# EAGLE board LED_driver (EAGLE 9.1.3)
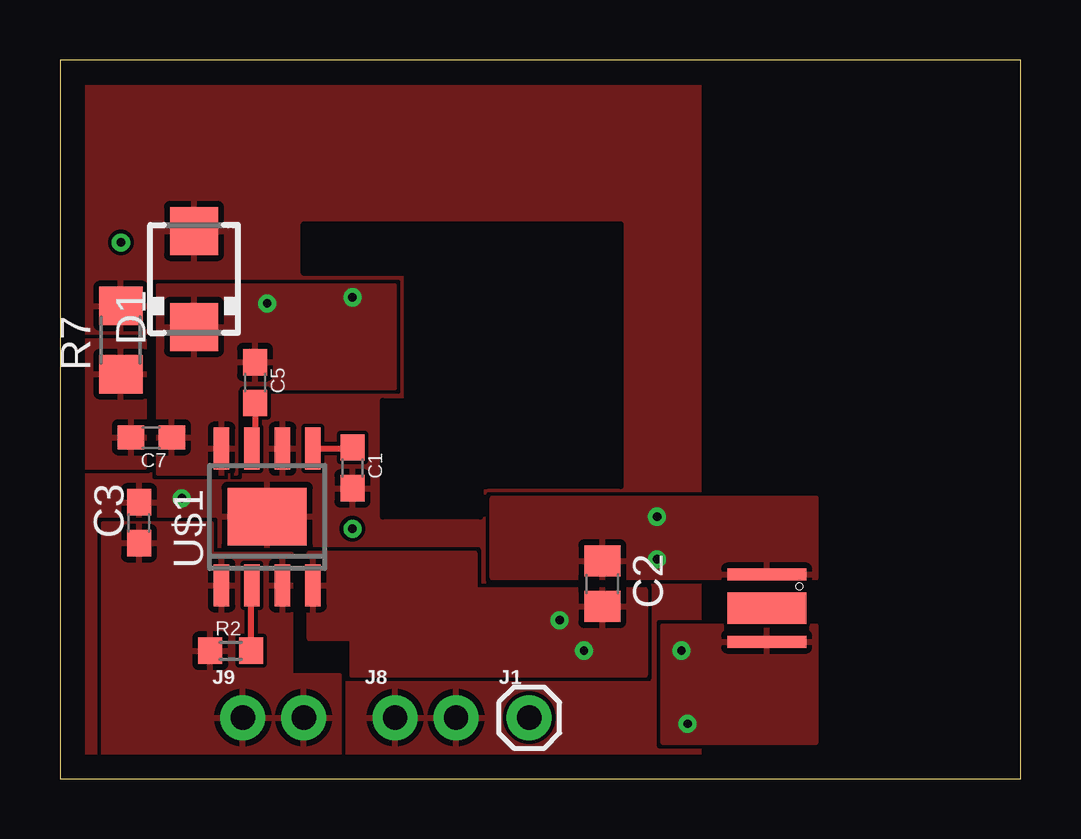
[diagram p0: board, top side]
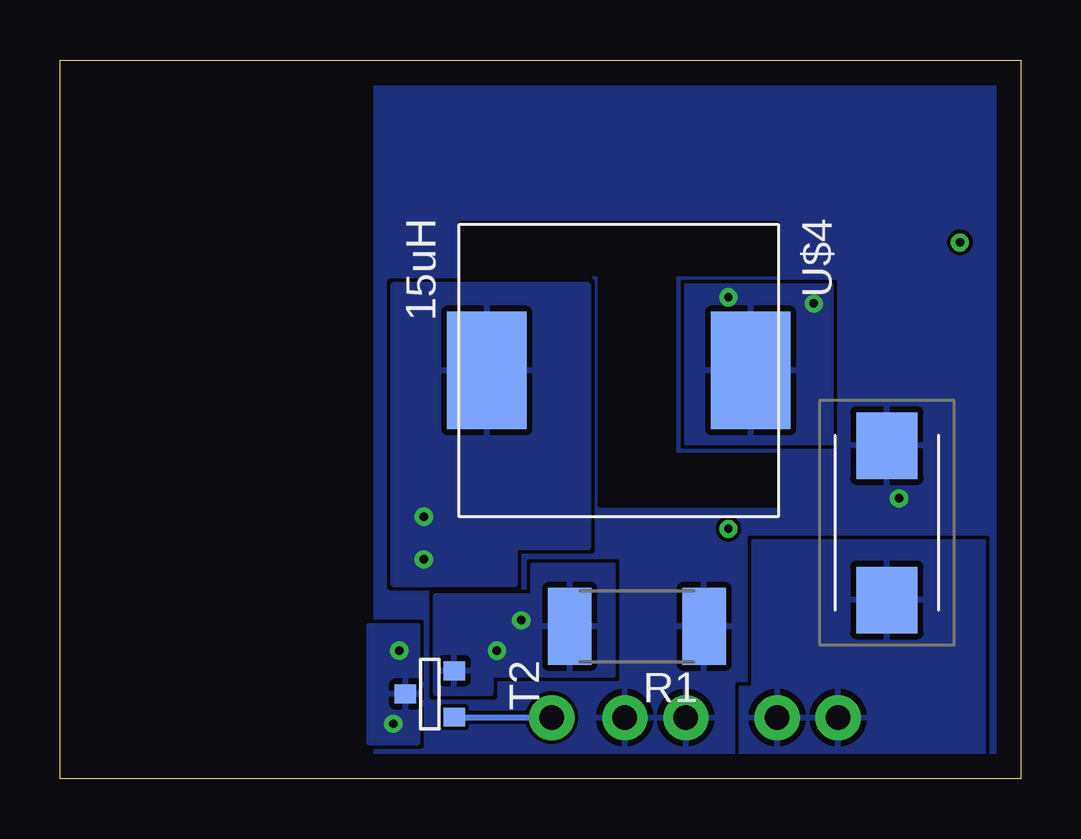
[diagram p1: board, bottom side, seen from below]

Size 40.06 x 29.96 mm. Coordinates in mm from the lower left corner, seen from the top.
Outline: 0,0 40.06,0 40.06,29.96 0,29.96 0,0
Copper layers (1*16): Top 0.035mm / dielectric 1.5mm / Bottom 0.035mm
Design rules "default": minimum track width 6mil, minimum drill 0.35mm, track to track 6mil, track to pad 6mil, pad to pad 6mil, via to via 6mil, smd to smd 6mil, copper to edge 40mil, drill to drill 6mil, minimum pad ring 10mil, minimum via ring 8mil, stop-mask expansion 4mil, vias tented up to drill 0mil, thermal gap 10mil

## Footprints (pad centres in the part's own frame; a part is rotated, then mirrored left to right if it is on the bottom)
C0603 = smd 1.1 x 1: 1 -0.85,0; 2 0.85,0
C0805 = smd 1.3 x 1.5: 1 -0.95,0; 2 0.95,0
CTAN(7.30_4.30MM) = smd 2.77 x 2.55: + -3.22,0; - 3.22,0
SMA = smd 2 x 2: A 2,0; C -2,0
1X01 = drill 1.016 pad 1.88: 1 0,0
1X02_NO_SILK = drill 1.016 pad 1.88: 1 0,0; 2 2.54,0
R2512 = smd 1.8 x 3.2: 1 -2.8,0; 2 2.8,0
R0603 = smd 1 x 1.1: 1 -0.85,0; 2 0.85,0
R1206 = smd 1.6 x 1.803: 1 -1.422,0; 2 1.422,0
SOT-23 = smd 0.787 x 0.889: 1 0.025,-1.016; 2 -0.94,1.016; 3 0.991,1.016
SOIC8N-LJ = smd 0.65 x 1.75: 1 -1.9,-2.86; 2 -0.63,-2.86; 3 0.64,-2.86; 4 1.91,-2.86; 5 1.91,2.84; 6 0.64,2.84; 7 -0.63,2.84; 8 -1.9,2.84 | smd 3.3 x 2.41: PAD 0,0
LED_00H53 = smd 0.5 x 3.3: LED+ -1.4,0; LED- 1.4,0 | smd 1.3 x 3.3: P$1 0,0
HCMA1305 = smd 4.9 x 3.3: P$1 0,5.5; P$2 0,-5.5

## Placement (x,y rotation side)
C1  0.1uF  [C0603]  12.19,12.95 270 top
C2  0.68uF 100V  [C0805]  22.61,8.13 270 top
C3  4.7uF  [C0603]  3.3,10.67 90 top
C5  0.1uF  [C0603]  8.13,16.51 270 top
C7  NP  [C0603]  3.81,14.22 180 top
C8  47uF  [CTAN(7.30_4.30MM)]  5.59,10.67 90 bottom
D1  60V 3A  [SMA]  5.59,20.83 90 top
J1  [1X01]  19.56,2.54 0 top
J8  [1X02_NO_SILK]  13.97,2.54 0 top
J9  [1X02_NO_SILK]  7.62,2.54 0 top
R1  0.082 1W  [R2512]  16,6.35 180 bottom
R2  140K  [R0603]  7.11,5.33 0 top
R7  NP  [R1206]  2.54,18.29 90 top
T2  [SOT-23]  24.64,3.56 270 bottom
U$1  A6211  [SOIC8N-LJ]  8.64,10.92 0 top
U$3  LED_00H53  [LED_00H53]  29.46,7.11 270 top
U$4  15uH  [HCMA1305]  16.76,17.02 270 bottom

## Library data of the parts
C1 C2 C5 C7 R1 R2 R7 = resistor
C3 = rcl
C8 = PowerComponents
D1 U$1 = BlueRobotics-Main
J1 J8 J9 = SparkFun-Connectors
T2 = zetex; OC_FARNELL: unknown; OC_NEWARK: unknown
U$3 = LED_00H53
U$4 = DiscreteComponents

## Nets
12V: C3.1 C8.+ J9.1 J9.2 R2.1 U$1.1 U$1.3
GND: C1.2 C3.2 C8.- D1.A J8.1 J8.2 R1.1 R7.2 U$1.6 U$1.PAD
LED+: C2.1 U$3.LED+ U$4.P$2
LED-: C2.2 R1.2 T2.2 U$1.4
LED_PWM: J1.1 T2.3
N$1: R2.2 U$1.2
N$2: C7.2 R7.1
N$3: T2.1 U$3.LED-
N$4: C5.2 U$1.7
N$5: C5.1 C7.1 D1.C U$1.8 U$4.P$1
VCC6211: C1.1 U$1.5

## Tracks (layer width: path | path; a pad name or v marks a point on that pad's centre or on a via)
12V
  pour Top: 1.78,10.67 6.35,10.67 6.35,9.4 9.65,9.4 9.65,4.32 11.68,4.32 11.68,1.02 1.78,1.02
  pour Bottom: 1.52,9.91 11.18,9.91 11.18,3.81 11.68,3.81 11.68,1.02 1.52,1.02
GND  (via drill 0.35)
  other vias: 5.08,11.68
  pour Top (rank 6): 1.02,29.21 26.67,29.21 26.67,0.25 1.02,0.25
  pour Bottom (rank 6): 1.02,0.25 1.02,29.46 26.92,29.46 26.92,0.25
LED+  (via drill 0.35)
  other vias: 24.89,10.92 24.89,9.14
  pour Bottom: 18.03,20.57 26.16,20.57 26.16,8.13 21.08,8.13 21.08,9.65 18.03,9.65
  pour Top: 31.5,8.38 18.03,8.38 18.03,11.68 31.5,11.68
LED-  (via drill 0.35)
  other vias: 20.83,6.6 21.84,5.33
  pour Bottom: 24.38,3.56 24.38,7.62 20.32,7.62 20.32,8.89 17.02,8.89 17.02,4.32 22.1,4.32 22.1,3.56
  pour Top: 21.34,7.87 24.38,7.87 24.38,4.32 12.19,4.32 12.19,5.08 12.19,5.84 10.41,5.84 10.41,9.4 17.27,9.4 17.27,7.87
LED_PWM
  Bottom 0.254: T2.3 19.56,2.56 J1.1
N$1
  Top 0.152: 7.96,8.06 U$1.2
  Top 0.254: R2.2 7.96,8.06
N$2
  pour Top: 1.02,18.29 3.56,18.29 3.56,14.99 3.56,12.95 1.02,12.95
N$3  (via drill 0.35)
  other vias: 25.91,5.33 26.16,2.29
  pour Top: 27.43,6.35 31.5,6.35 31.5,1.52 25.15,1.52 25.15,6.35
  pour Bottom: 25.15,6.35 27.18,6.35 27.18,1.52 25.15,1.52
N$4
  Top 0.152: 8.13,13.76 U$1.7
  Top 0.254: C5.2 8.13,13.76
N$5  (via drill 0.35)
  other vias: 8.64,19.81 12.19,20.07
  pour Top: 4.06,12.7 4.06,20.57 5.08,20.57 13.97,20.57 13.97,19.3 13.97,16.26 7.37,16.26 7.37,12.7
  pour Bottom: 13.97,13.97 7.87,13.97 7.87,20.57 13.97,20.57
N$6  (via drill 0.35)
  other vias: 2.54,22.35
N$8  (via drill 0.35)
  other vias: 12.19,10.41
NGND
  cutout Top: 10.16,23.11 23.37,23.11 23.37,12.19 17.78,12.19 17.53,12.19 17.53,10.92 13.46,10.92 13.46,15.75 14.48,15.75 14.48,21.08 10.16,21.08
  cutout Bottom: 10.16,23.11 23.37,23.11 23.37,21.08 17.53,21.08 17.53,11.43 10.16,11.43 10.16,13.46 10.67,13.46 14.48,13.46 14.48,21.08 10.16,21.08
VCC6211
  Top 0.152: 12.19,13.76 C1.1
  Top 0.254: U$1.5 12.19,13.76